# EAGLE board 14167-SparkFun ESP32 Thing Plus DMX to LED Shield-Panel (EAGLE 9.1.0), part 1 of 2
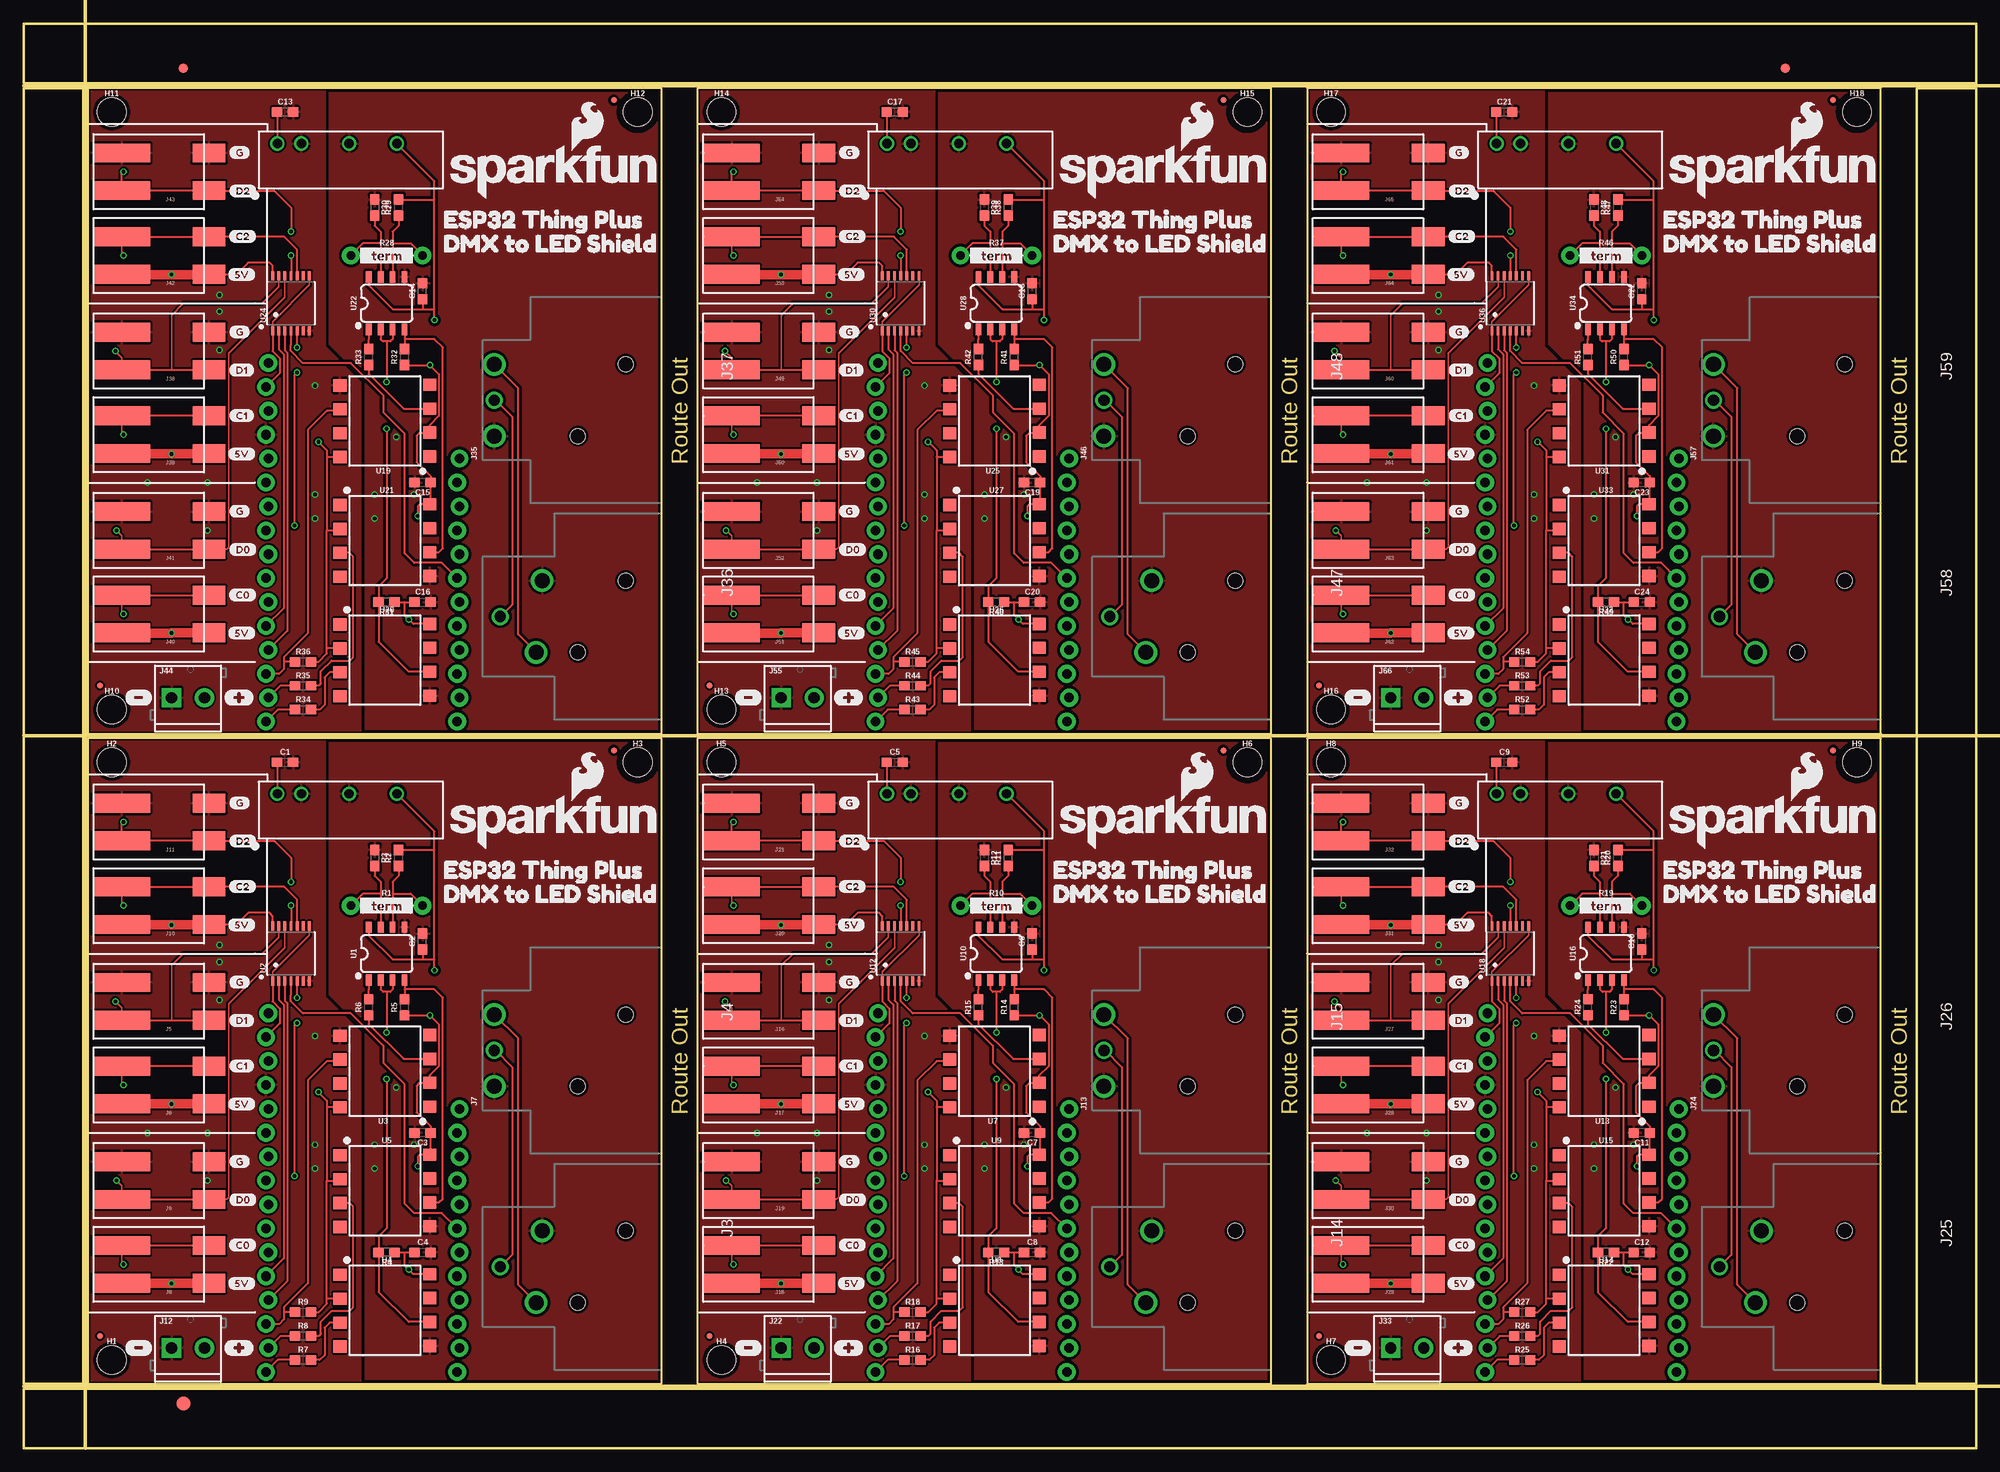
[diagram p0: board, top side]
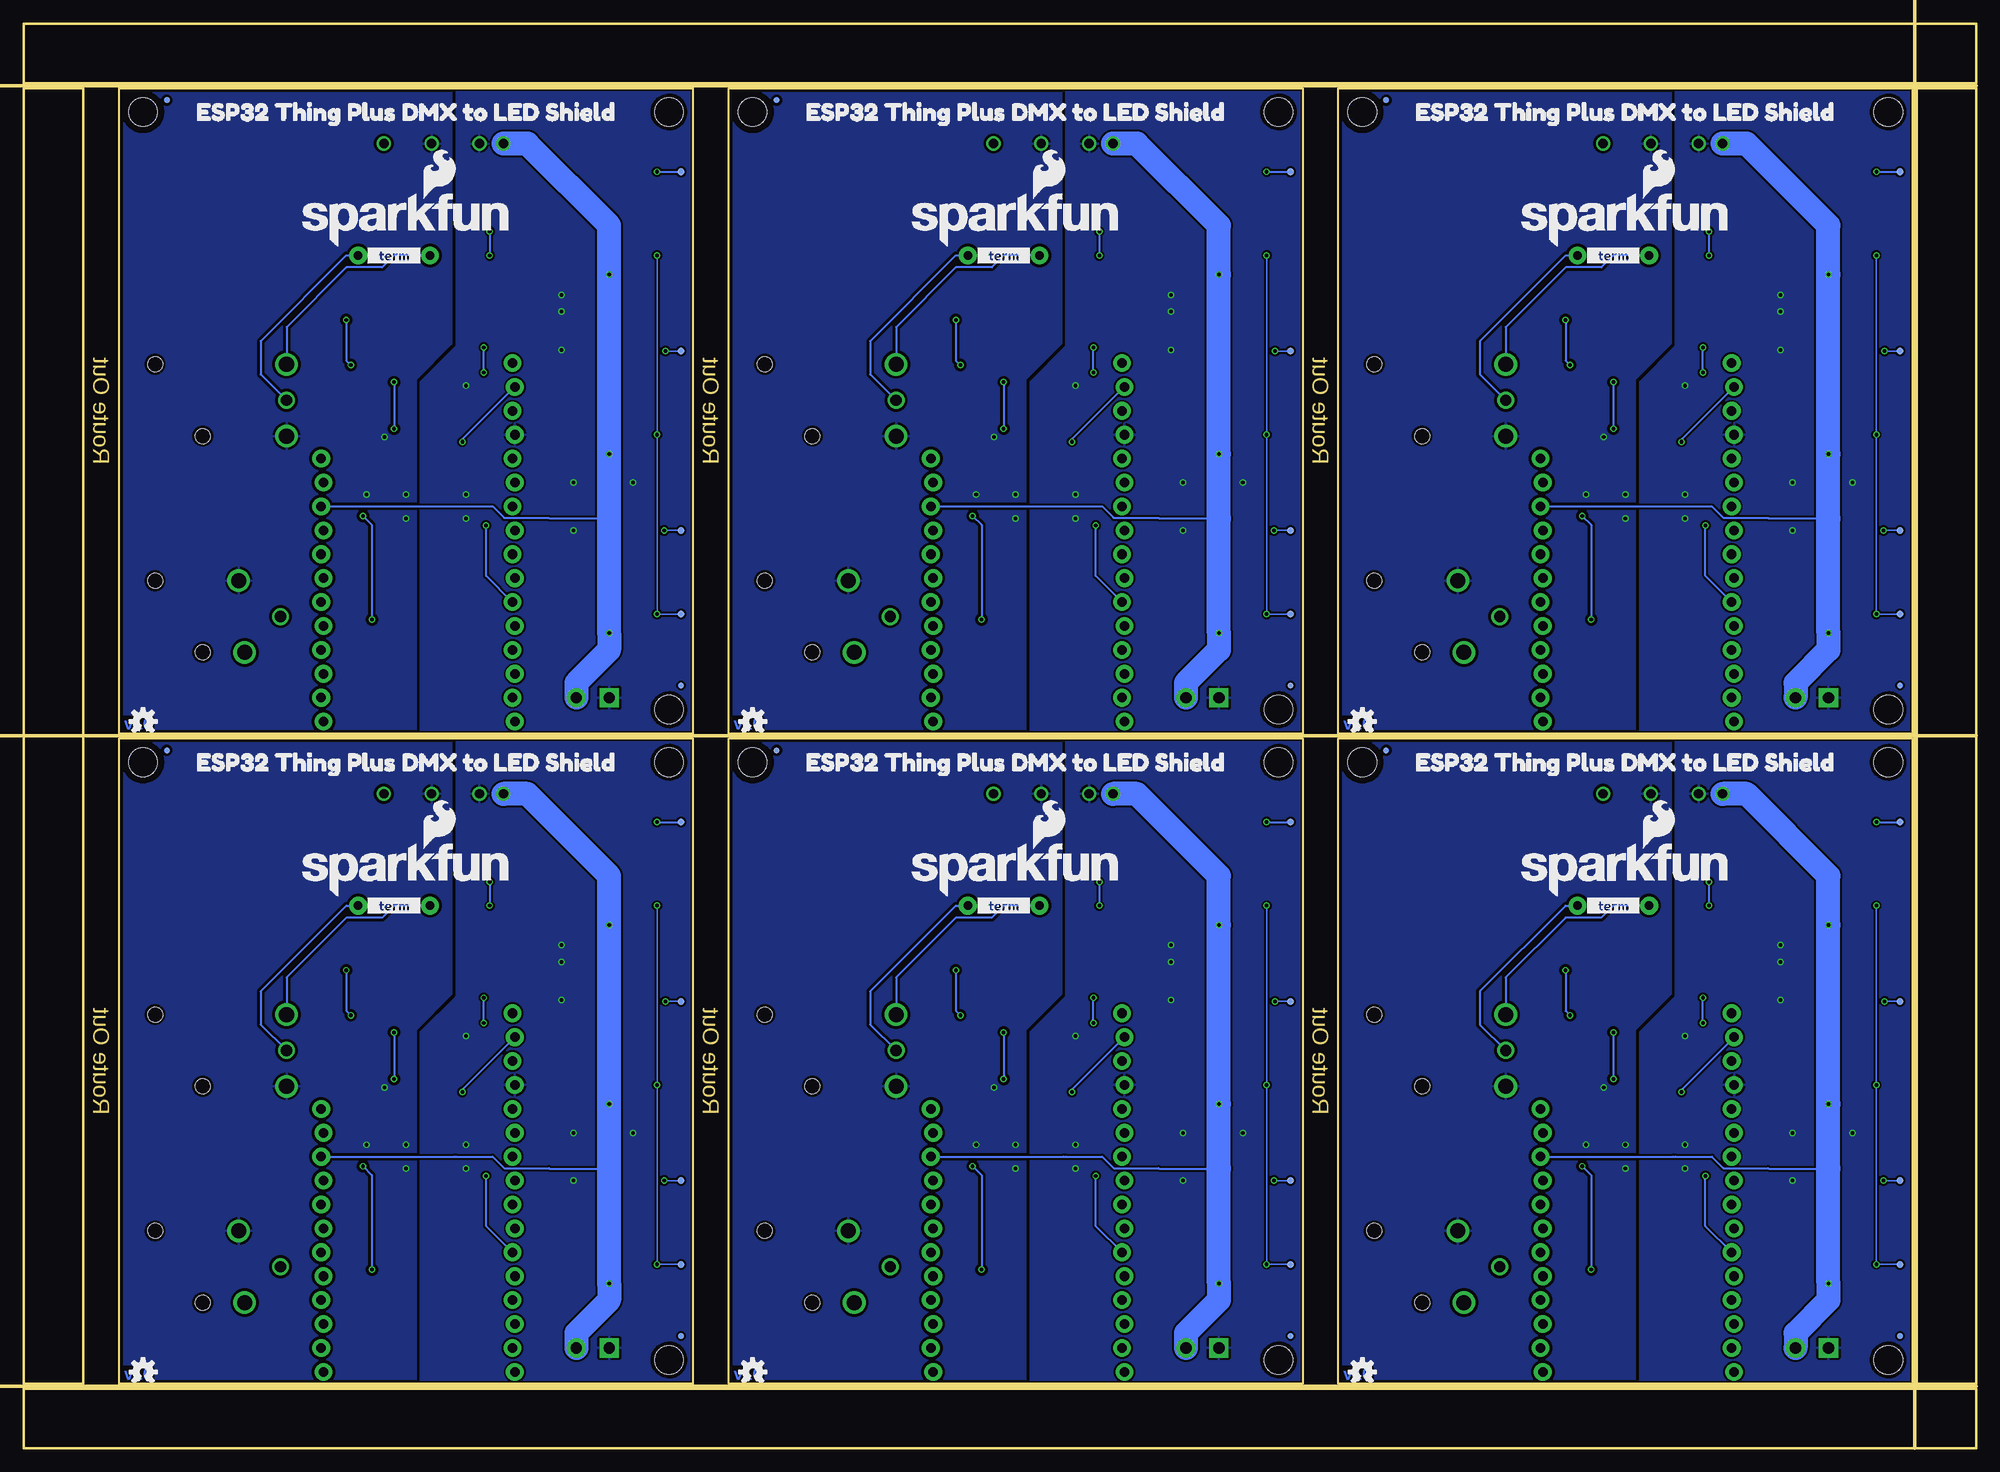
[diagram p1: board, bottom side, seen from below]

Size 207.49 x 151.38 mm. Coordinates in mm from the lower left corner, seen from the top.
Outline: 6.83,6.86 67.79,6.86 67.79,75.44 6.83,75.44 6.83,6.86
Outline: 71.6,6.86 132.56,6.86 132.56,75.44 71.6,75.44 71.6,6.86
Outline: 136.37,6.86 197.33,6.86 197.33,75.44 136.37,75.44 136.37,6.86
Outline: 6.83,75.95 67.79,75.95 67.79,144.53 6.83,144.53 6.83,75.95
Outline: 71.6,75.95 132.56,75.95 132.56,144.53 71.6,144.53 71.6,75.95
Outline: 136.37,75.95 197.33,75.95 197.33,144.53 136.37,144.53 136.37,75.95
Outline: 0,6.35 207.49,6.35 207.49,0 0,0 0,6.35
Outline: 201.14,144.53 207.49,144.53 207.49,6.86 201.14,6.86 201.14,144.53
Outline: 0,151.38 207.49,151.38 207.49,145.03 0,145.03 0,151.38
Outline: 0,144.53 6.32,144.53 6.32,6.86 0,6.86 0,144.53
Copper layers (1*16): Top 0.035mm / dielectric 1.5mm / Bottom 0.035mm
Design rules "SparkFun-2-layer-PCBWay-LIMIT": minimum track width 6mil, minimum drill 0.3mm, track to track 6mil, track to pad 6mil, pad to pad 6mil, via to via 6mil, smd to smd 6mil, copper to edge 6mil, drill to drill 6mil, minimum pad ring 6mil, minimum via ring 6mil, stop-mask expansion 4mil, vias tented up to drill 25mil, thermal gap 10mil
Net classes: 0 default: clearance 0.205 mm
Milling: 4 lines

## Footprints (pad centres in the part's own frame; a part is rotated, then mirrored left to right if it is on the bottom)
0603 = smd 1.1 x 1: 1 -0.85,0; 2 0.85,0
FIDUCIAL-1X2 = smd 1 x 1: 1 0,0
FIDUCIAL-1.5X3 = smd 1.5 x 1.5: 1 0,0
FIDUCIAL-MICRO = smd 0.635 x 0.635: 1 0,0
STAND-OFF-TIGHT = hole 3.048: 0,0
1X16_LOCK_NO_SILK = drill 1.016 pad 1.88: 1 -19.05,0.127; 2 -16.51,-0.127; 3 -13.97,0.127; 4 -11.43,-0.127; 5 -8.89,0.127; 6 -6.35,-0.127; 7 -3.81,0.127; 8 -1.27,-0.127; 9 1.27,0.127; 10 3.81,-0.127; 11 6.35,0.127; 12 8.89,-0.127; 13 11.43,0.127; 14 13.97,-0.127; 15 16.51,0.127; 16 19.05,-0.127
XLR-3_FEMALE = drill 1.6: 1 -3.81,0; 2 3.81,-0.635 | drill 1.2: 3 0,-4.445 | hole 1.6: -3.81,8.89; 3.81,3.81
XLR-3_MALE = drill 1.6: 1 3.81,-8.89; 2 -3.81,-8.89 | drill 1.2: 3 0,-8.89 | hole 1.6: -3.81,5.08; 3.81,0
1X02_POKEHOME = smd 3.5 x 2: P1 5.25,2; P2 5.25,-2 | smd 6 x 2: P3 -4,2; P4 -4,-2
1X12_LOCK_NO_SILK = drill 1.016 pad 1.88: 1 0,0.127; 2 2.54,-0.127; 3 5.08,0.127; 4 7.62,-0.127; 5 10.16,0.127; 6 12.7,-0.127; 7 15.24,0.127; 8 17.78,-0.127; 9 20.32,0.127; 10 22.86,-0.127; 11 25.4,0.127; 12 27.94,-0.127
SCREWTERMINAL-3.5MM-2 = drill 1.2 pad 2.032 square: 1 0,0 | drill 1.2 pad 2.032: 2 3.5,0
AXIAL-0.3EZ = drill 0.9 pad 1.88: P$1 -3.81,0; P$2 3.81,0
PAD.03X.03 = smd 0.762 x 0.762: P$1 0,0
SO08 = smd 0.6 x 1.2: 1 -1.905,-2.8; 2 -0.635,-2.8; 3 0.635,-2.8; 4 1.905,-2.8; 5 1.905,2.8; 6 0.635,2.8; 7 -0.635,2.8; 8 -1.905,2.8
TSSOP14 = smd 0.305 x 0.991: 1 -1.95,-2.918; 2 -1.3,-2.918; 3 -0.65,-2.918; 4 0,-2.918; 5 0.65,-2.918; 6 1.3,-2.918; 7 1.95,-2.918; 8 1.95,2.918; 9 1.3,2.918; 10 0.65,2.918; 11 0,2.918; 12 -0.65,2.918; 13 -1.3,2.918; 14 -1.95,2.918
8-SMD = smd 1.3 x 1.4: 1 -3.96,-4.96; 2 -1.42,-4.96; 3 1.12,-4.96; 4 3.66,-4.96; 5 3.59,4.58; 6 1.05,4.58; 7 -1.49,4.58; 8 -4.03,4.58
RFB-0505S = drill 1: 1 -7.8,1.73; 2 -5.26,1.73; 4 -0.18,1.73; 6 4.9,1.73

## Placement (x,y rotation side)
C1  4.7uF  [0603]  27.79,72.9 0 top
C2  0.1uF  [0603]  42.39,53.85 90 top
C3  0.1uF  [0603]  42.39,33.53 180 top
C4  0.1uF  [0603]  42.39,20.83 0 top
C5  4.7uF  [0603]  92.56,72.9 0 top
C6  0.1uF  [0603]  107.16,53.85 90 top
C7  0.1uF  [0603]  107.16,33.53 180 top
C8  0.1uF  [0603]  107.16,20.83 0 top
C9  4.7uF  [0603]  157.33,72.9 0 top
C10  0.1uF  [0603]  171.93,53.85 90 top
C11  0.1uF  [0603]  171.93,33.53 180 top
C12  0.1uF  [0603]  171.93,20.83 0 top
C13  4.7uF  [0603]  27.79,141.99 0 top
C14  0.1uF  [0603]  42.39,122.94 90 top
C15  0.1uF  [0603]  42.39,102.62 180 top
C16  0.1uF  [0603]  42.39,89.92 0 top
C17  4.7uF  [0603]  92.56,141.99 0 top
C18  0.1uF  [0603]  107.16,122.94 90 top
C19  0.1uF  [0603]  107.16,102.62 180 top
C20  0.1uF  [0603]  107.16,89.92 0 top
C21  4.7uF  [0603]  157.33,141.99 0 top
C22  0.1uF  [0603]  171.93,122.94 90 top
C23  0.1uF  [0603]  171.93,102.62 180 top
C24  0.1uF  [0603]  171.93,89.92 0 top
E$1  [FIDUCIAL-1X2]  16.99,146.62 0 top
E$2  [FIDUCIAL-1X2]  187.17,146.62 0 top
E$3  [FIDUCIAL-1.5X3]  16.99,4.76 0 top
FD1  FIDUCIALUFIDUCIAL  [FIDUCIAL-MICRO]  8.1,11.94 0 bottom
FD2  FIDUCIALUFIDUCIAL  [FIDUCIAL-MICRO]  8.1,11.94 0 top
FD3  FIDUCIALUFIDUCIAL  [FIDUCIAL-MICRO]  62.71,74.17 0 top
FD4  FIDUCIALUFIDUCIAL  [FIDUCIAL-MICRO]  62.71,74.17 0 bottom
FD5  FIDUCIALUFIDUCIAL  [FIDUCIAL-MICRO]  72.87,11.94 0 bottom
FD6  FIDUCIALUFIDUCIAL  [FIDUCIAL-MICRO]  72.87,11.94 0 top
FD7  FIDUCIALUFIDUCIAL  [FIDUCIAL-MICRO]  127.48,74.17 0 top
FD8  FIDUCIALUFIDUCIAL  [FIDUCIAL-MICRO]  127.48,74.17 0 bottom
FD9  FIDUCIALUFIDUCIAL  [FIDUCIAL-MICRO]  137.64,11.94 0 bottom
FD10  FIDUCIALUFIDUCIAL  [FIDUCIAL-MICRO]  137.64,11.94 0 top
FD11  FIDUCIALUFIDUCIAL  [FIDUCIAL-MICRO]  192.25,74.17 0 top
FD12  FIDUCIALUFIDUCIAL  [FIDUCIAL-MICRO]  192.25,74.17 0 bottom
FD13  FIDUCIALUFIDUCIAL  [FIDUCIAL-MICRO]  8.1,81.03 0 bottom
FD14  FIDUCIALUFIDUCIAL  [FIDUCIAL-MICRO]  8.1,81.03 0 top
FD15  FIDUCIALUFIDUCIAL  [FIDUCIAL-MICRO]  62.71,143.26 0 top
FD16  FIDUCIALUFIDUCIAL  [FIDUCIAL-MICRO]  62.71,143.26 0 bottom
FD17  FIDUCIALUFIDUCIAL  [FIDUCIAL-MICRO]  72.87,81.03 0 bottom
FD18  FIDUCIALUFIDUCIAL  [FIDUCIAL-MICRO]  72.87,81.03 0 top
FD19  FIDUCIALUFIDUCIAL  [FIDUCIAL-MICRO]  127.48,143.26 0 top
FD20  FIDUCIALUFIDUCIAL  [FIDUCIAL-MICRO]  127.48,143.26 0 bottom
FD21  FIDUCIALUFIDUCIAL  [FIDUCIAL-MICRO]  137.64,81.03 0 bottom
FD22  FIDUCIALUFIDUCIAL  [FIDUCIAL-MICRO]  137.64,81.03 0 top
FD23  FIDUCIALUFIDUCIAL  [FIDUCIAL-MICRO]  192.25,143.26 0 top
FD24  FIDUCIALUFIDUCIAL  [FIDUCIAL-MICRO]  192.25,143.26 0 bottom
H1  STAND-OFFTIGHT  [STAND-OFF-TIGHT]  9.37,9.4 0 top
H2  STAND-OFFTIGHT  [STAND-OFF-TIGHT]  9.37,72.9 0 top
H3  STAND-OFFTIGHT  [STAND-OFF-TIGHT]  65.25,72.9 0 top
H4  STAND-OFFTIGHT  [STAND-OFF-TIGHT]  74.14,9.4 0 top
H5  STAND-OFFTIGHT  [STAND-OFF-TIGHT]  74.14,72.9 0 top
H6  STAND-OFFTIGHT  [STAND-OFF-TIGHT]  130.02,72.9 0 top
H7  STAND-OFFTIGHT  [STAND-OFF-TIGHT]  138.91,9.4 0 top
H8  STAND-OFFTIGHT  [STAND-OFF-TIGHT]  138.91,72.9 0 top
H9  STAND-OFFTIGHT  [STAND-OFF-TIGHT]  194.79,72.9 0 top
H10  STAND-OFFTIGHT  [STAND-OFF-TIGHT]  9.37,78.49 0 top
H11  STAND-OFFTIGHT  [STAND-OFF-TIGHT]  9.37,141.99 0 top
H12  STAND-OFFTIGHT  [STAND-OFF-TIGHT]  65.25,141.99 0 top
H13  STAND-OFFTIGHT  [STAND-OFF-TIGHT]  74.14,78.49 0 top
H14  STAND-OFFTIGHT  [STAND-OFF-TIGHT]  74.14,141.99 0 top
H15  STAND-OFFTIGHT  [STAND-OFF-TIGHT]  130.02,141.99 0 top
H16  STAND-OFFTIGHT  [STAND-OFF-TIGHT]  138.91,78.49 0 top
H17  STAND-OFFTIGHT  [STAND-OFF-TIGHT]  138.91,141.99 0 top
H18  STAND-OFFTIGHT  [STAND-OFF-TIGHT]  194.79,141.99 0 top
J1  [1X16_LOCK_NO_SILK]  25.88,27.18 270 top
J2  [1X16_LOCK_NO_SILK]  90.65,27.18 270 top
J3  XLR-3-FEMALE  [XLR-3_FEMALE]  55.09,19.29 270 top
J4  XLR-3-MALE  [XLR-3_MALE]  58.9,42.28 270 top
J5  [1X02_POKEHOME]  14.45,47.5 0 top
J6  [1X02_POKEHOME]  14.45,38.61 0 top
J7  [1X12_LOCK_NO_SILK]  46.2,36.07 270 top
J8  [1X02_POKEHOME]  14.45,19.56 0 top
J9  [1X02_POKEHOME]  14.45,28.45 0 top
J10  [1X02_POKEHOME]  14.45,57.66 0 top
J11  [1X02_POKEHOME]  14.45,66.55 0 top
J12  [SCREWTERMINAL-3.5MM-2]  15.72,10.67 0 top
J13  [1X12_LOCK_NO_SILK]  110.97,36.07 270 top
J14  XLR-3-FEMALE  [XLR-3_FEMALE]  119.86,19.29 270 top
J15  XLR-3-MALE  [XLR-3_MALE]  123.67,42.28 270 top
J16  [1X02_POKEHOME]  79.22,47.5 0 top
J17  [1X02_POKEHOME]  79.22,38.61 0 top
J18  [1X02_POKEHOME]  79.22,19.56 0 top
J19  [1X02_POKEHOME]  79.22,28.45 0 top
J20  [1X02_POKEHOME]  79.22,57.66 0 top
J21  [1X02_POKEHOME]  79.22,66.55 0 top
J22  [SCREWTERMINAL-3.5MM-2]  80.49,10.67 0 top
J23  [1X16_LOCK_NO_SILK]  155.42,27.18 270 top
J24  [1X12_LOCK_NO_SILK]  175.74,36.07 270 top
J25  XLR-3-FEMALE  [XLR-3_FEMALE]  184.63,19.29 270 top
J26  XLR-3-MALE  [XLR-3_MALE]  188.44,42.28 270 top
J27  [1X02_POKEHOME]  143.99,47.5 0 top
J28  [1X02_POKEHOME]  143.99,38.61 0 top
J29  [1X02_POKEHOME]  143.99,19.56 0 top
J30  [1X02_POKEHOME]  143.99,28.45 0 top
J31  [1X02_POKEHOME]  143.99,57.66 0 top
J32  [1X02_POKEHOME]  143.99,66.55 0 top
J33  [SCREWTERMINAL-3.5MM-2]  145.26,10.67 0 top
J34  [1X16_LOCK_NO_SILK]  25.88,96.27 270 top
J35  [1X12_LOCK_NO_SILK]  46.2,105.16 270 top
J36  XLR-3-FEMALE  [XLR-3_FEMALE]  55.09,88.38 270 top
J37  XLR-3-MALE  [XLR-3_MALE]  58.9,111.37 270 top
J38  [1X02_POKEHOME]  14.45,116.59 0 top
J39  [1X02_POKEHOME]  14.45,107.7 0 top
J40  [1X02_POKEHOME]  14.45,88.65 0 top
J41  [1X02_POKEHOME]  14.45,97.54 0 top
J42  [1X02_POKEHOME]  14.45,126.75 0 top
J43  [1X02_POKEHOME]  14.45,135.64 0 top
J44  [SCREWTERMINAL-3.5MM-2]  15.72,79.76 0 top
J45  [1X16_LOCK_NO_SILK]  90.65,96.27 270 top
J46  [1X12_LOCK_NO_SILK]  110.97,105.16 270 top
J47  XLR-3-FEMALE  [XLR-3_FEMALE]  119.86,88.38 270 top
J48  XLR-3-MALE  [XLR-3_MALE]  123.67,111.37 270 top
J49  [1X02_POKEHOME]  79.22,116.59 0 top
J50  [1X02_POKEHOME]  79.22,107.7 0 top
J51  [1X02_POKEHOME]  79.22,88.65 0 top
J52  [1X02_POKEHOME]  79.22,97.54 0 top
J53  [1X02_POKEHOME]  79.22,126.75 0 top
J54  [1X02_POKEHOME]  79.22,135.64 0 top
J55  [SCREWTERMINAL-3.5MM-2]  80.49,79.76 0 top
J56  [1X16_LOCK_NO_SILK]  155.42,96.27 270 top
J57  [1X12_LOCK_NO_SILK]  175.74,105.16 270 top
J58  XLR-3-FEMALE  [XLR-3_FEMALE]  184.63,88.38 270 top
J59  XLR-3-MALE  [XLR-3_MALE]  188.44,111.37 270 top
J60  [1X02_POKEHOME]  143.99,116.59 0 top
J61  [1X02_POKEHOME]  143.99,107.7 0 top
J62  [1X02_POKEHOME]  143.99,88.65 0 top
J63  [1X02_POKEHOME]  143.99,97.54 0 top
J64  [1X02_POKEHOME]  143.99,126.75 0 top
J65  [1X02_POKEHOME]  143.99,135.64 0 top
J66  [SCREWTERMINAL-3.5MM-2]  145.26,79.76 0 top
LOGO1  SFE_LOGO_NAME_FLAME.2_INCH  [SFE_LOGO_NAME_FLAME_.2]  56.36,66.55 0 top
LOGO2  SFE_LOGO_NAME_FLAME.2_INCH  [SFE_LOGO_NAME_FLAME_.2]  37.31,61.47 0 bottom
LOGO3  OSHW-LOGOS  [OSHW-LOGO-S]  65.25,8.13 0 bottom
LOGO4  SFE_LOGO_NAME_FLAME.2_INCH  [SFE_LOGO_NAME_FLAME_.2]  121.13,66.55 0 top
LOGO5  SFE_LOGO_NAME_FLAME.2_INCH  [SFE_LOGO_NAME_FLAME_.2]  102.08,61.47 0 bottom
LOGO6  OSHW-LOGOS  [OSHW-LOGO-S]  130.02,8.13 0 bottom
LOGO7  SFE_LOGO_NAME_FLAME.2_INCH  [SFE_LOGO_NAME_FLAME_.2]  185.9,66.55 0 top
LOGO8  SFE_LOGO_NAME_FLAME.2_INCH  [SFE_LOGO_NAME_FLAME_.2]  166.85,61.47 0 bottom
LOGO9  OSHW-LOGOS  [OSHW-LOGO-S]  194.79,8.13 0 bottom
LOGO10  SFE_LOGO_NAME_FLAME.2_INCH  [SFE_LOGO_NAME_FLAME_.2]  56.36,135.64 0 top
LOGO11  SFE_LOGO_NAME_FLAME.2_INCH  [SFE_LOGO_NAME_FLAME_.2]  37.31,130.56 0 bottom
LOGO12  OSHW-LOGOS  [OSHW-LOGO-S]  65.25,77.22 0 bottom
LOGO13  SFE_LOGO_NAME_FLAME.2_INCH  [SFE_LOGO_NAME_FLAME_.2]  121.13,135.64 0 top
LOGO14  SFE_LOGO_NAME_FLAME.2_INCH  [SFE_LOGO_NAME_FLAME_.2]  102.08,130.56 0 bottom
LOGO15  OSHW-LOGOS  [OSHW-LOGO-S]  130.02,77.22 0 bottom
LOGO16  SFE_LOGO_NAME_FLAME.2_INCH  [SFE_LOGO_NAME_FLAME_.2]  185.9,135.64 0 top
LOGO17  SFE_LOGO_NAME_FLAME.2_INCH  [SFE_LOGO_NAME_FLAME_.2]  166.85,130.56 0 bottom
LOGO18  OSHW-LOGOS  [OSHW-LOGO-S]  194.79,77.22 0 bottom
R1  DNP  [AXIAL-0.3EZ]  38.58,57.66 0 top
R2  680  [0603]  39.85,62.74 90 top
R3  680  [0603]  37.31,62.74 270 top
R4  470  [0603]  38.58,20.83 180 top
R5  470  [0603]  40.49,46.86 90 top
R6  470  [0603]  36.68,46.86 90 top
R7  330  [0603]  29.69,9.4 0 top
R8  330  [0603]  29.69,11.94 0 top
R9  470  [0603]  29.69,14.48 0 top
R10  DNP  [AXIAL-0.3EZ]  103.35,57.66 0 top
R11  680  [0603]  104.62,62.74 90 top
R12  680  [0603]  102.08,62.74 270 top
R13  470  [0603]  103.35,20.83 180 top
R14  470  [0603]  105.26,46.86 90 top
R15  470  [0603]  101.45,46.86 90 top
R16  330  [0603]  94.46,9.4 0 top
R17  330  [0603]  94.46,11.94 0 top
R18  470  [0603]  94.46,14.48 0 top
R19  DNP  [AXIAL-0.3EZ]  168.12,57.66 0 top
R20  680  [0603]  169.39,62.74 90 top
R21  680  [0603]  166.85,62.74 270 top
R22  470  [0603]  168.12,20.83 180 top
R23  470  [0603]  170.03,46.86 90 top
R24  470  [0603]  166.22,46.86 90 top
R25  330  [0603]  159.23,9.4 0 top
R26  330  [0603]  159.23,11.94 0 top
R27  470  [0603]  159.23,14.48 0 top
R28  DNP  [AXIAL-0.3EZ]  38.58,126.75 0 top
R29  680  [0603]  39.85,131.83 90 top
R30  680  [0603]  37.31,131.83 270 top
R31  470  [0603]  38.58,89.92 180 top
R32  470  [0603]  40.49,115.95 90 top
R33  470  [0603]  36.68,115.95 90 top
R34  330  [0603]  29.69,78.49 0 top
R35  330  [0603]  29.69,81.03 0 top
R36  470  [0603]  29.69,83.57 0 top
R37  DNP  [AXIAL-0.3EZ]  103.35,126.75 0 top
R38  680  [0603]  104.62,131.83 90 top
R39  680  [0603]  102.08,131.83 270 top
R40  470  [0603]  103.35,89.92 180 top
R41  470  [0603]  105.26,115.95 90 top
R42  470  [0603]  101.45,115.95 90 top
R43  330  [0603]  94.46,78.49 0 top
R44  330  [0603]  94.46,81.03 0 top
R45  470  [0603]  94.46,83.57 0 top
R46  DNP  [AXIAL-0.3EZ]  168.12,126.75 0 top
R47  680  [0603]  169.39,131.83 90 top
R48  680  [0603]  166.85,131.83 270 top
R49  470  [0603]  168.12,89.92 180 top
R50  470  [0603]  170.03,115.95 90 top
R51  470  [0603]  166.22,115.95 90 top
R52  330  [0603]  159.23,78.49 0 top
R53  330  [0603]  159.23,81.03 0 top
R54  470  [0603]  159.23,83.57 0 top
TP1  TEST-POINT3  [PAD.03X.03]  8.1,47.5 0 bottom
TP2  TEST-POINT3  [PAD.03X.03]  8.1,28.45 0 bottom
TP3  TEST-POINT3  [PAD.03X.03]  8.1,66.55 0 bottom
TP4  TEST-POINT3  [PAD.03X.03]  8.1,19.56 0 bottom
TP5  TEST-POINT3  [PAD.03X.03]  72.87,47.5 0 bottom
TP6  TEST-POINT3  [PAD.03X.03]  72.87,28.45 0 bottom
TP7  TEST-POINT3  [PAD.03X.03]  72.87,66.55 0 bottom
TP8  TEST-POINT3  [PAD.03X.03]  72.87,19.56 0 bottom
TP9  TEST-POINT3  [PAD.03X.03]  137.64,47.5 0 bottom
TP10  TEST-POINT3  [PAD.03X.03]  137.64,28.45 0 bottom
TP11  TEST-POINT3  [PAD.03X.03]  137.64,66.55 0 bottom
TP12  TEST-POINT3  [PAD.03X.03]  137.64,19.56 0 bottom
TP13  TEST-POINT3  [PAD.03X.03]  8.1,116.59 0 bottom
TP14  TEST-POINT3  [PAD.03X.03]  8.1,97.54 0 bottom
TP15  TEST-POINT3  [PAD.03X.03]  8.1,135.64 0 bottom
TP16  TEST-POINT3  [PAD.03X.03]  8.1,88.65 0 bottom
TP17  TEST-POINT3  [PAD.03X.03]  72.87,116.59 0 bottom
TP18  TEST-POINT3  [PAD.03X.03]  72.87,97.54 0 bottom
TP19  TEST-POINT3  [PAD.03X.03]  72.87,135.64 0 bottom
TP20  TEST-POINT3  [PAD.03X.03]  72.87,88.65 0 bottom
TP21  TEST-POINT3  [PAD.03X.03]  137.64,116.59 0 bottom
TP22  TEST-POINT3  [PAD.03X.03]  137.64,97.54 0 bottom
TP23  TEST-POINT3  [PAD.03X.03]  137.64,135.64 0 bottom
TP24  TEST-POINT3  [PAD.03X.03]  137.64,88.65 0 bottom
U1  MAX3485CSA  [SO08]  38.58,52.58 0 top
U2  TXB0104  [TSSOP14]  28.42,52.58 0 top
U3  6N137S  [8-SMD]  38.2,40.26 90 top
U4  6N137S  [8-SMD]  38.58,14.48 270 top
U5  6N137S  [8-SMD]  38.58,27.18 270 top
U6  RFB-0505S  [RFB-0505S]  34.77,67.82 0 top
U7  6N137S  [8-SMD]  102.97,40.26 90 top
U8  6N137S  [8-SMD]  103.35,14.48 270 top
U9  6N137S  [8-SMD]  103.35,27.18 270 top
U10  MAX3485CSA  [SO08]  103.35,52.58 0 top
U11  RFB-0505S  [RFB-0505S]  99.54,67.82 0 top
U12  TXB0104  [TSSOP14]  93.19,52.58 0 top
U13  6N137S  [8-SMD]  167.74,40.26 90 top
U14  6N137S  [8-SMD]  168.12,14.48 270 top
U15  6N137S  [8-SMD]  168.12,27.18 270 top
U16  MAX3485CSA  [SO08]  168.12,52.58 0 top
U17  RFB-0505S  [RFB-0505S]  164.31,67.82 0 top
U18  TXB0104  [TSSOP14]  157.96,52.58 0 top
U19  6N137S  [8-SMD]  38.2,109.35 90 top
U20  6N137S  [8-SMD]  38.58,83.57 270 top
U21  6N137S  [8-SMD]  38.58,96.27 270 top
U22  MAX3485CSA  [SO08]  38.58,121.67 0 top
U23  RFB-0505S  [RFB-0505S]  34.77,136.91 0 top
U24  TXB0104  [TSSOP14]  28.42,121.67 0 top
U25  6N137S  [8-SMD]  102.97,109.35 90 top
U26  6N137S  [8-SMD]  103.35,83.57 270 top
U27  6N137S  [8-SMD]  103.35,96.27 270 top
U28  MAX3485CSA  [SO08]  103.35,121.67 0 top
U29  RFB-0505S  [RFB-0505S]  99.54,136.91 0 top
U30  TXB0104  [TSSOP14]  93.19,121.67 0 top
U31  6N137S  [8-SMD]  167.74,109.35 90 top
U32  6N137S  [8-SMD]  168.12,83.57 270 top
U33  6N137S  [8-SMD]  168.12,96.27 270 top
U34  MAX3485CSA  [SO08]  168.12,121.67 0 top
U35  RFB-0505S  [RFB-0505S]  164.31,136.91 0 top
U36  TXB0104  [TSSOP14]  157.96,121.67 0 top
U$1  [__TERM__0]  35.28,57.66 0 top
U$2  [__TERM__0]  41.88,57.66 0 bottom
U$3  [ESP32_THING_PLUS6]  107.8,61.47 0 top
U$4  [DMX_TO_LED_SHIELD7]  107.8,58.93 0 top
U$5  [ESP32_THING_PLUS6]  125.96,72.9 0 bottom
U$6  [DMX_TO_LED_SHIELD7]  104.11,72.9 0 bottom
U$7  [5V7]  86.46,55.63 0 top
U$8  [5V7]  86.46,17.53 0 top
U$9  [C01]  86.59,21.59 0 top
U$10  [D00]  86.59,26.42 0 top
U$11  [ESP32_THING_PLUS6]  43.03,61.47 0 top
U$12  [DMX_TO_LED_SHIELD7]  43.03,58.93 0 top
U$13  [ESP32_THING_PLUS6]  61.19,72.9 0 bottom
U$14  [DMX_TO_LED_SHIELD7]  39.34,72.9 0 bottom
U$15  [5V7]  21.69,55.63 0 top
U$16  [#0]  10.77,10.67 0 top
U$17  [5V7]  21.69,17.53 0 top
U$18  [C01]  21.82,21.59 0 top
U$19  [D00]  21.82,26.42 0 top
U$20  [G8]  21.82,68.58 0 top
U$21  [5V7]  21.69,36.58 0 top
U$22  [C12]  21.82,40.64 0 top
U$23  [D16]  21.82,45.47 0 top
U$24  [G8]  21.82,49.53 0 top
U$25  [#1]  21.31,10.67 0 top
U$26  [C24]  21.82,59.69 0 top
U$27  [D23]  21.82,64.52 0 top
U$28  [G8]  21.82,30.48 0 top
U$29  [G8]  86.59,68.58 0 top
U$30  [5V7]  86.46,36.58 0 top
U$31  [C12]  86.59,40.64 0 top
U$32  [D16]  86.59,45.47 0 top
U$33  [G8]  86.59,49.53 0 top
U$34  [C24]  86.59,59.69 0 top
U$35  [D23]  86.59,64.52 0 top
U$36  [G8]  86.59,30.48 0 top
U$37  [#0]  75.54,10.67 0 top
U$38  [#1]  86.08,10.67 0 top
U$39  [__TERM__0]  100.05,57.66 0 top
U$40  [__TERM__0]  106.65,57.66 0 bottom
U$41  [ESP32_THING_PLUS6]  172.57,61.47 0 top
U$42  [DMX_TO_LED_SHIELD7]  172.57,58.93 0 top
U$43  [ESP32_THING_PLUS6]  190.73,72.9 0 bottom
U$44  [DMX_TO_LED_SHIELD7]  168.88,72.9 0 bottom
U$45  [5V7]  151.23,55.63 0 top
U$46  [5V7]  151.23,17.53 0 top
U$47  [C01]  151.36,21.59 0 top
U$48  [D00]  151.36,26.42 0 top
U$49  [G8]  151.36,68.58 0 top
U$50  [5V7]  151.23,36.58 0 top
U$51  [C12]  151.36,40.64 0 top
U$52  [D16]  151.36,45.47 0 top
U$53  [G8]  151.36,49.53 0 top
U$54  [C24]  151.36,59.69 0 top
U$55  [D23]  151.36,64.52 0 top
U$56  [G8]  151.36,30.48 0 top
U$57  [#0]  140.31,10.67 0 top
U$58  [#1]  150.85,10.67 0 top
U$59  [__TERM__0]  164.82,57.66 0 top
U$60  [__TERM__0]  171.42,57.66 0 bottom
U$61  [ESP32_THING_PLUS6]  43.03,130.56 0 top
U$62  [DMX_TO_LED_SHIELD7]  43.03,128.02 0 top
U$63  [ESP32_THING_PLUS6]  61.19,141.99 0 bottom
U$64  [DMX_TO_LED_SHIELD7]  39.34,141.99 0 bottom
U$65  [5V7]  21.69,124.71 0 top
U$66  [5V7]  21.69,86.61 0 top
U$67  [C01]  21.82,90.68 0 top
U$68  [D00]  21.82,95.5 0 top
U$69  [G8]  21.82,137.67 0 top
U$70  [5V7]  21.69,105.66 0 top
U$71  [C12]  21.82,109.73 0 top
U$72  [D16]  21.82,114.55 0 top
U$73  [G8]  21.82,118.62 0 top
U$74  [C24]  21.82,128.78 0 top
U$75  [D23]  21.82,133.6 0 top
U$76  [G8]  21.82,99.57 0 top
U$77  [#0]  10.77,79.76 0 top
U$78  [#1]  21.31,79.76 0 top
U$79  [__TERM__0]  35.28,126.75 0 top
U$80  [__TERM__0]  41.88,126.75 0 bottom
U$81  [ESP32_THING_PLUS6]  107.8,130.56 0 top
U$82  [DMX_TO_LED_SHIELD7]  107.8,128.02 0 top
U$83  [ESP32_THING_PLUS6]  125.96,141.99 0 bottom
U$84  [DMX_TO_LED_SHIELD7]  104.11,141.99 0 bottom
U$85  [5V7]  86.46,124.71 0 top
U$86  [5V7]  86.46,86.61 0 top
U$87  [C01]  86.59,90.68 0 top
U$88  [D00]  86.59,95.5 0 top
U$89  [G8]  86.59,137.67 0 top
U$90  [5V7]  86.46,105.66 0 top
U$91  [C12]  86.59,109.73 0 top
U$92  [D16]  86.59,114.55 0 top
U$93  [G8]  86.59,118.62 0 top
U$94  [C24]  86.59,128.78 0 top
U$95  [D23]  86.59,133.6 0 top
U$96  [G8]  86.59,99.57 0 top
U$97  [#0]  75.54,79.76 0 top
U$98  [#1]  86.08,79.76 0 top
U$99  [__TERM__0]  100.05,126.75 0 top
U$100  [__TERM__0]  106.65,126.75 0 bottom
U$101  [ESP32_THING_PLUS6]  172.57,130.56 0 top
U$102  [DMX_TO_LED_SHIELD7]  172.57,128.02 0 top
U$103  [ESP32_THING_PLUS6]  190.73,141.99 0 bottom
U$104  [DMX_TO_LED_SHIELD7]  168.88,141.99 0 bottom
U$105  [5V7]  151.23,124.71 0 top
U$106  [5V7]  151.23,86.61 0 top
U$107  [C01]  151.36,90.68 0 top
U$108  [D00]  151.36,95.5 0 top
U$109  [G8]  151.36,137.67 0 top
U$110  [5V7]  151.23,105.66 0 top
U$111  [C12]  151.36,109.73 0 top
U$112  [D16]  151.36,114.55 0 top
U$113  [G8]  151.36,118.62 0 top
U$114  [C24]  151.36,128.78 0 top
U$115  [D23]  151.36,133.6 0 top
U$116  [G8]  151.36,99.57 0 top
U$117  [#0]  140.31,79.76 0 top
U$118  [#1]  150.85,79.76 0 top
U$119  [__TERM__0]  164.82,126.75 0 top
U$120  [__TERM__0]  171.42,126.75 0 bottom

## Library data of the parts
C1 C5 C9 C13 C17 C21 = SparkFun-Capacitors; PROD_ID: CAP-08280
C2-C4 C6-C8 C10-C12 C14-C16 C18-C20 C22-C24 = SparkFun-Capacitors; PROD_ID: CAP-00810
E$1 E$2 FD1-FD24 LOGO1-LOGO18 = SparkFun-Aesthetics
E$3 = SparkFun-Retired
H1-H18 = SparkFun-Hardware
J1 J2 J7 J13 J23 J24 J34 J35 J45 J46 J56 J57 TP1-TP24 = SparkFun-Connectors
J3 J14 J25 J36 J47 J58 = SparkFun-Connectors; PROD_ID: CONN-14142
J4 J15 J26 J37 J48 J59 = SparkFun-Connectors; PROD_ID: CONN-14141
J5 J6 J8-J11 J16-J21 J27-J32 J38-J43 J49-J54 J60-J65 = SparkFun-Connectors; PROD_ID: CONN-13512
J12 J22 J33 J44 J55 J66 = SparkFun-Connectors; PROD_ID: CONN-08399
R1 R10 R19 R28 R37 R46 = SparkFun-Resistors; PROD_ID: RES-12181
R2 R3 R11 R12 R20 R21 R29 R30 R38 R39 R47 R48 = SparkFun-Resistors; PROD_ID: RES-09333
R4-R6 R9 R13-R15 R18 R22-R24 R27 R31-R33 R36 R40-R42 R45 R49-R51 R54 = SparkFun-Resistors; PROD_ID: RES-07869
R7 R8 R16 R17 R25 R26 R34 R35 R43 R44 R52 R53 = SparkFun-Resistors; PROD_ID: RES-00818
U1 U10 U16 U22 U28 U34 = SparkFun-IC-Comms; PROD_ID: IC-09388
U2 U12 U18 U24 U30 U36 = SparkFun-IC-Comms; PROD_ID: IC-13929
U3-U5 U7-U9 U13-U15 U19-U21 U25-U27 U31-U33 = SparkFun-DiscreteSemi; PROD_ID: IC-14151
U6 U11 U17 U23 U29 U35 = SparkFun-IC-Power; PROD_ID: IC-14143
U$1 U$2 U$39 U$40 U$59 U$60 U$79 U$80 U$99 U$100 U$119 U$120 = buzzard_labels (1)
U$3 U$5 U$11 U$13 U$41 U$43 U$61 U$63 U$81 U$83 U$101 U$103 = buzzard_labels (4)
U$4 U$6 U$12 U$14 U$42 U$44 U$62 U$64 U$82 U$84 U$102 U$104 = buzzard_labels (5)
U$7-U$10 U$15 U$17-U$24 U$26-U$36 U$45-U$56 U$65-U$76 U$85-U$96 U$105-U$116 = buzzard_labels (6)
U$16 U$25 U$37 U$38 U$57 U$58 U$77 U$78 U$97 U$98 U$117 U$118 = buzzard_labels (11)

## Nets
1: J13.8
2: J13.7
3: J13.5
3.3V: J1.2 R9.2 U2.1 U2.8 U3.8 U4.2 U5.2
3.3V1: J2.2 R18.2 U7.8 U8.2 U9.2 U12.1 U12.8
3.3V2: J23.2 R27.2 U13.8 U14.2 U15.2 U18.1 U18.8
3.3V3: J34.2 R36.2 U19.8 U20.2 U21.2 U24.1 U24.8
3.3V4: J45.2 R45.2 U25.8 U26.2 U27.2 U30.1 U30.8
3.3V5: J56.2 R54.2 U31.8 U32.2 U33.2 U36.1 U36.8
4: J13.4
5: J13.10
5V: C1.1 J6.P2 J6.P4 J7.3 J8.P2 J8.P4 J10.P2 J10.P4 J12.2 U2.14 U6.1
5V1: C5.1 J13.3 J17.P2 J17.P4 J18.P2 J18.P4 J20.P2 J20.P4 J22.2 U11.1 U12.14
5V2: C9.1 J24.3 J28.P2 J28.P4 J29.P2 J29.P4 J31.P2 J31.P4 J33.2 U17.1 U18.14
5V3: C13.1 J35.3 J39.P2 J39.P4 J40.P2 J40.P4 J42.P2 J42.P4 J44.2 U23.1 U24.14
5V4: C17.1 J46.3 J50.P2 J50.P4 J51.P2 J51.P4 J53.P2 J53.P4 J55.2 U29.1 U30.14
5V5: C21.1 J57.3 J61.P2 J61.P4 J62.P2 J62.P4 J64.P2 J64.P4 J66.2 U35.1 U36.14
6: J13.9
7: J24.8
8: J24.7
9: J24.5
10: J24.4
11: J24.10
12: J24.9
13: J7.4
14: J7.10
15: J7.8
16: J35.8
17: J35.7
18: J35.5
19: J35.4
20: J7.5
21: J35.10
22: J35.9
23: J46.8
24: J46.7
25: J46.5
26: J46.4
27: J46.10
28: J46.9
29: J57.8
30: J57.7
31: J57.5
32: J7.9
33: J7.7
34: J57.4
35: J57.10
36: J57.9
485/EN: J1.16 R7.1
485/EN1: J2.16 R16.1
485/EN2: J23.16 R25.1
485/EN3: J34.16 R34.1
485/EN4: J45.16 R43.1
485/EN5: J56.16 R52.1
485/RX: J1.15 R8.1
485/RX1: J2.15 R17.1
485/RX2: J23.15 R26.1
485/RX3: J34.15 R35.1
485/RX4: J45.15 R44.1
485/RX5: J56.15 R53.1
485/TX: J1.14 R9.1 U3.6
485/TX1: J2.14 R18.1 U7.6
485/TX2: J23.14 R27.1 U13.6
485/TX3: J34.14 R36.1 U19.6
485/TX4: J45.14 R45.1 U25.6
485/TX5: J56.14 R54.1 U31.6
A: J3.3 J4.3 R1.P$2 R2.1 U1.6
A0: J1.5
A1: J1.6
A2: J1.7
A3: J1.8
A4: J1.9
A5: J1.10
A6: J2.5
A7: J2.6
A8: J2.7
A9: J2.9
A10: J2.10
A11: J2.8
A12: J14.3 J15.3 R10.P$2 R11.1 U10.6
A13: J23.5
A14: J23.6
A15: J23.7
A16: J23.9
A17: J23.10
A18: J23.8
A19: J25.3 J26.3 R19.P$2 R20.1 U16.6
A20: J34.5
A21: J34.6
A22: J34.7
A23: J34.9
A24: J34.10
A25: J34.8
A26: J36.3 J37.3 R28.P$2 R29.1 U22.6
A27: J45.5
A28: J45.6
A29: J45.7
A30: J45.9
A31: J45.10
A32: J45.8
A33: J47.3 J48.3 R37.P$2 R38.1 U28.6
A34: J56.5
A35: J56.6
A36: J56.7
A37: J56.9
A38: J56.10
A39: J56.8
A40: J58.3 J59.3 R46.P$2 R47.1 U34.6
B: J3.2 J4.2 R1.P$1 R3.2 U1.7
B1: J14.2 J15.2 R10.P$1 R12.2 U10.7
B2: J25.2 J26.2 R19.P$1 R21.2 U16.7
B3: J36.2 J37.2 R28.P$1 R30.2 U22.7
B4: J47.2 J48.2 R37.P$1 R39.2 U28.7
B5: J58.2 J59.2 R46.P$1 R48.2 U34.7
DATA1: J1.12 U2.2
DATA2: J1.13 U2.3
DATA3: J7.6 U2.4
DATA4: J13.6 U12.4
DATA5: J2.13 U12.3
DATA6: J2.12 U12.2
DATA7: J24.6 U18.4
DATA8: J23.13 U18.3
DATA9: J23.12 U18.2
DATA10: J35.6 U24.4
DATA11: J34.13 U24.3
DATA12: J34.12 U24.2
DATA13: J46.6 U30.4
DATA14: J45.13 U30.3
DATA15: J45.12 U30.2
DATA16: J57.6 U36.4
DATA17: J56.13 U36.3
DATA18: J56.12 U36.2
EN: J7.2
EN1: J13.2
EN2: J24.2
EN3: J35.2
EN4: J46.2
EN5: J57.2
GND: C1.2 J1.4 J5.P1 J5.P3 J9.P1 J9.P3 J11.P1 J11.P3 J12.1 U2.7 U3.5 U6.2
GND1: C5.2 J2.4 J16.P1 J16.P3 J19.P1 J19.P3 J21.P1 J21.P3 J22.1 U7.5 U11.2 U12.7
GND2: C9.2 J23.4 J27.P1 J27.P3 J30.P1 J30.P3 J32.P1 J32.P3 J33.1 U13.5 U17.2 U18.7
GND3: C13.2 J34.4 J38.P1 J38.P3 J41.P1 J41.P3 J43.P1 J43.P3 J44.1 U19.5 U23.2 U24.7
GND4: C17.2 J45.4 J49.P1 J49.P3 J52.P1 J52.P3 J54.P1 J54.P3 J55.1 U25.5 U29.2 U30.7
GND5: C21.2 J56.4 J60.P1 J60.P3 J63.P1 J63.P3 J65.P1 J65.P3 J66.1 U31.5 U35.2 U36.7
GND-ISO: C2.2 C3.2 C4.2 J3.1 J4.1 R3.1 U1.5 U4.5 U5.5 U6.4
GND-ISO1: C6.2 C7.2 C8.2 J14.1 J15.1 R12.1 U8.5 U9.5 U10.5 U11.4
GND-ISO2: C10.2 C11.2 C12.2 J25.1 J26.1 R21.1 U14.5 U15.5 U16.5 U17.4
GND-ISO3: C14.2 C15.2 C16.2 J36.1 J37.1 R30.1 U20.5 U21.5 U22.5 U23.4
GND-ISO4: C18.2 C19.2 C20.2 J47.1 J48.1 R39.1 U26.5 U27.5 U28.5 U29.4
GND-ISO5: C22.2 C23.2 C24.2 J58.1 J59.1 R48.1 U32.5 U33.5 U34.5 U35.4
HV-DATA1: J5.P2 J5.P4 TP1.P$1 U2.13
HV-DATA2: J9.P2 J9.P4 TP2.P$1 U2.12
HV-DATA3: J11.P2 J11.P4 TP3.P$1 U2.11
HV-DATA4: J19.P2 J19.P4 TP6.P$1 U12.12
HV-DATA5: J21.P2 J21.P4 TP7.P$1 U12.11
HV-DATA6: J16.P2 J16.P4 TP5.P$1 U12.13
HV-DATA7: J30.P2 J30.P4 TP10.P$1 U18.12
HV-DATA8: J32.P2 J32.P4 TP11.P$1 U18.11
HV-DATA9: J27.P2 J27.P4 TP9.P$1 U18.13
HV-DATA10: J41.P2 J41.P4 TP14.P$1 U24.12
HV-DATA11: J43.P2 J43.P4 TP15.P$1 U24.11
HV-DATA12: J38.P2 J38.P4 TP13.P$1 U24.13
HV-DATA13: J52.P2 J52.P4 TP18.P$1 U30.12
HV-DATA14: J54.P2 J54.P4 TP19.P$1 U30.11
HV-DATA15: J49.P2 J49.P4 TP17.P$1 U30.13
HV-DATA16: J63.P2 J63.P4 TP22.P$1 U36.12
HV-DATA17: J65.P2 J65.P4 TP23.P$1 U36.11
HV-DATA18: J60.P2 J60.P4 TP21.P$1 U36.13
HV-LED-CLOCK: J6.P1 J6.P3 J8.P1 J8.P3 J10.P1 J10.P3 TP4.P$1 U2.10
HV-LED-CLOCK1: J17.P1 J17.P3 J18.P1 J18.P3 J20.P1 J20.P3 TP8.P$1 U12.10
HV-LED-CLOCK2: J28.P1 J28.P3 J29.P1 J29.P3 J31.P1 J31.P3 TP12.P$1 U18.10
HV-LED-CLOCK3: J39.P1 J39.P3 J40.P1 J40.P3 J42.P1 J42.P3 TP16.P$1 U24.10
HV-LED-CLOCK4: J50.P1 J50.P3 J51.P1 J51.P3 J53.P1 J53.P3 TP20.P$1 U30.10
HV-LED-CLOCK5: J61.P1 J61.P3 J62.P1 J62.P3 J64.P1 J64.P3 TP24.P$1 U36.10
LED-CLOCK: J1.11 U2.5
LED-CLOCK1: J2.11 U12.5
LED-CLOCK2: J23.11 U18.5
LED-CLOCK3: J34.11 U24.5
LED-CLOCK4: J45.11 U30.5
LED-CLOCK5: J56.11 U36.5
N$1: R8.2 U5.3
N$2: R7.2 U4.3
N$3: R4.2 U1.2 U1.3 U4.6
N$4: R5.2 U1.4 U5.6
N$5: R6.1 U3.3
N$6: R6.2 U1.1
N$7: R13.2 U8.6 U10.2 U10.3
N$8: R15.1 U7.3
N$9: R15.2 U10.1
N$10: R14.2 U9.6 U10.4
N$11: R17.2 U9.3
N$12: R16.2 U8.3
N$13: R22.2 U14.6 U16.2 U16.3
N$14: R24.1 U13.3
N$15: R24.2 U16.1
N$16: R23.2 U15.6 U16.4
N$17: R26.2 U15.3
N$18: R25.2 U14.3
N$19: R31.2 U20.6 U22.2 U22.3
N$20: R33.1 U19.3
N$21: R33.2 U22.1
N$22: R32.2 U21.6 U22.4
N$23: R35.2 U21.3
N$24: R34.2 U20.3
N$25: R40.2 U26.6 U28.2 U28.3
N$26: R42.1 U25.3
N$27: R42.2 U28.1
N$28: R41.2 U27.6 U28.4
N$29: R44.2 U27.3
N$30: R43.2 U26.3
N$31: R49.2 U32.6 U34.2 U34.3
N$32: R51.1 U31.3
N$33: R51.2 U34.1
N$34: R50.2 U33.6 U34.4
N$35: R53.2 U33.3
N$36: R52.2 U32.3
NC: J1.3
NC1: J2.3
NC2: J23.3
NC3: J34.3
NC4: J45.3
NC5: J56.3
RST: J1.1
RST1: J2.1
RST2: J23.1
RST3: J34.1
RST4: J45.1
RST5: J56.1
SCL: J7.11
SCL1: J13.11
SCL2: J24.11
SCL3: J35.11
SCL4: J46.11
SCL5: J57.11
SDA: J7.12
SDA1: J13.12
SDA2: J24.12
SDA3: J35.12
SDA4: J46.12
SDA5: J57.12
VBAT: J7.1
VBAT1: J13.1
VBAT2: J24.1
VBAT3: J35.1
VBAT4: J46.1
VBAT5: J57.1
VCC-ISO: C2.1 C3.1 C4.1 R2.2 R4.1 R5.1 U1.8 U3.2 U4.8 U5.8 U6.6
VCC-ISO1: C6.1 C7.1 C8.1 R11.2 R13.1 R14.1 U7.2 U8.8 U9.8 U10.8 U11.6
VCC-ISO2: C10.1 C11.1 C12.1 R20.2 R22.1 R23.1 U13.2 U14.8 U15.8 U16.8 U17.6
VCC-ISO3: C14.1 C15.1 C16.1 R29.2 R31.1 R32.1 U19.2 U20.8 U21.8 U22.8 U23.6
VCC-ISO4: C18.1 C19.1 C20.1 R38.2 R40.1 R41.1 U25.2 U26.8 U27.8 U28.8 U29.6
VCC-ISO5: C22.1 C23.1 C24.1 R47.2 R49.1 R50.1 U31.2 U32.8 U33.8 U34.8 U35.6